# Altium PCB 电机驱动.PcbDoc
Units mil, origin at the board's own origin, x right, y up, seen from the top; angles counter-clockwise.
Board outline 2580 x 1430 mil, 2 copper layers (Top Layer, Bottom Layer); 41 components, 23 nets, 112 pads, 100 vias.
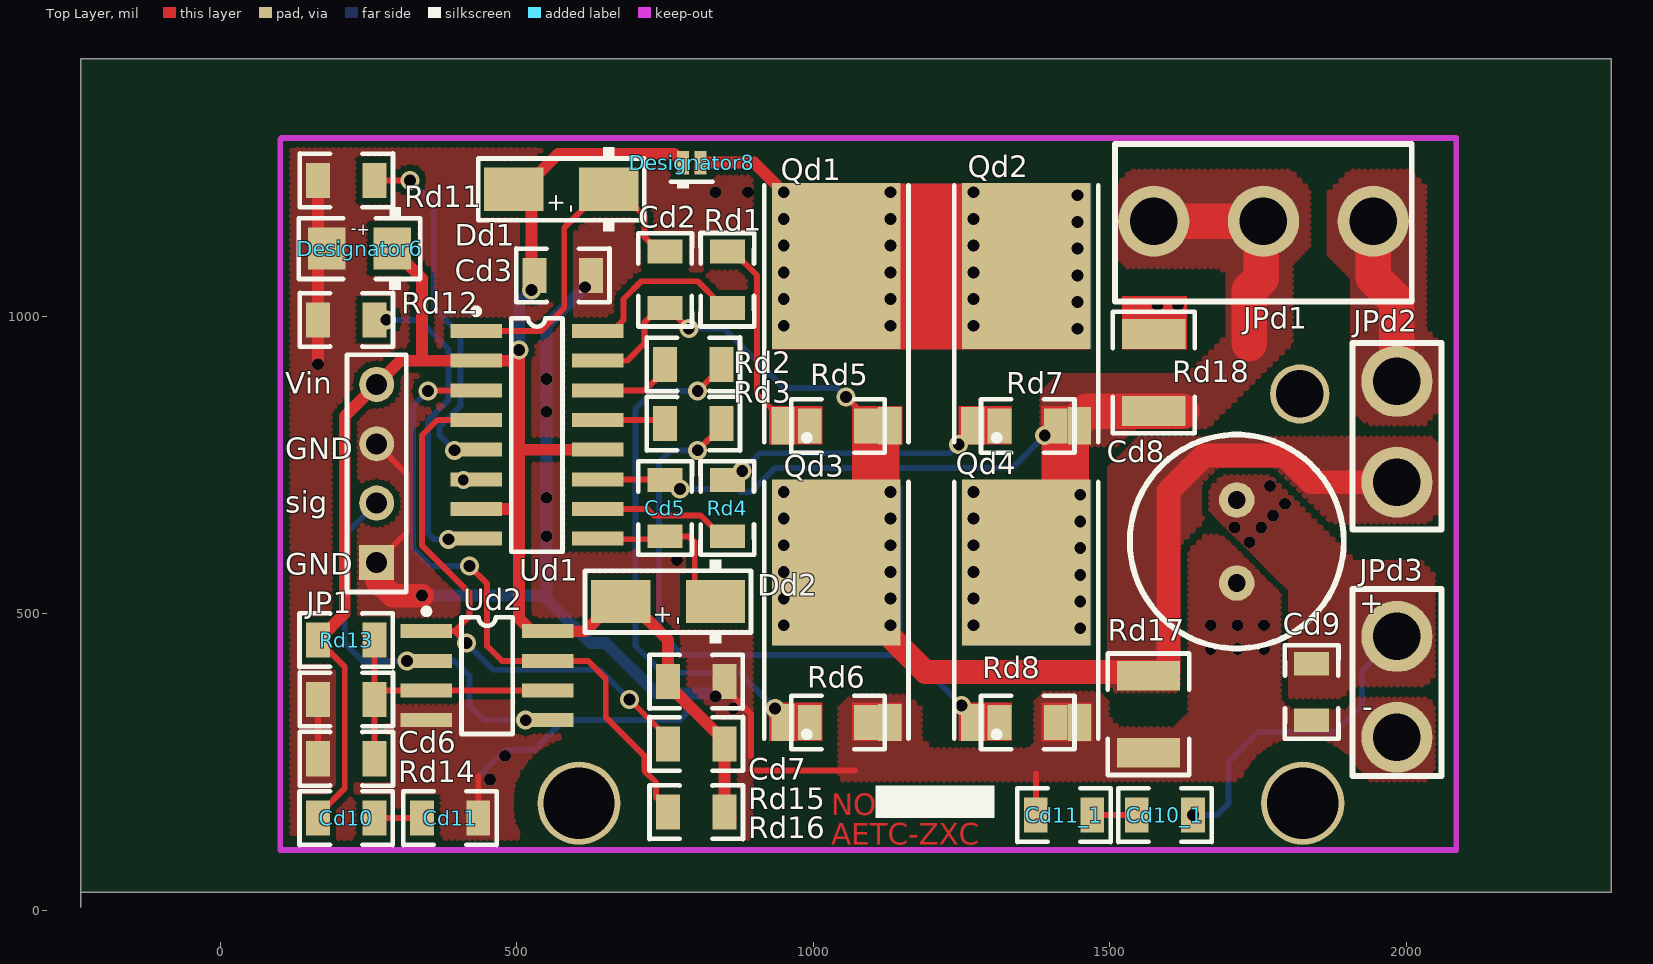
[diagram p0: Top Layer view]
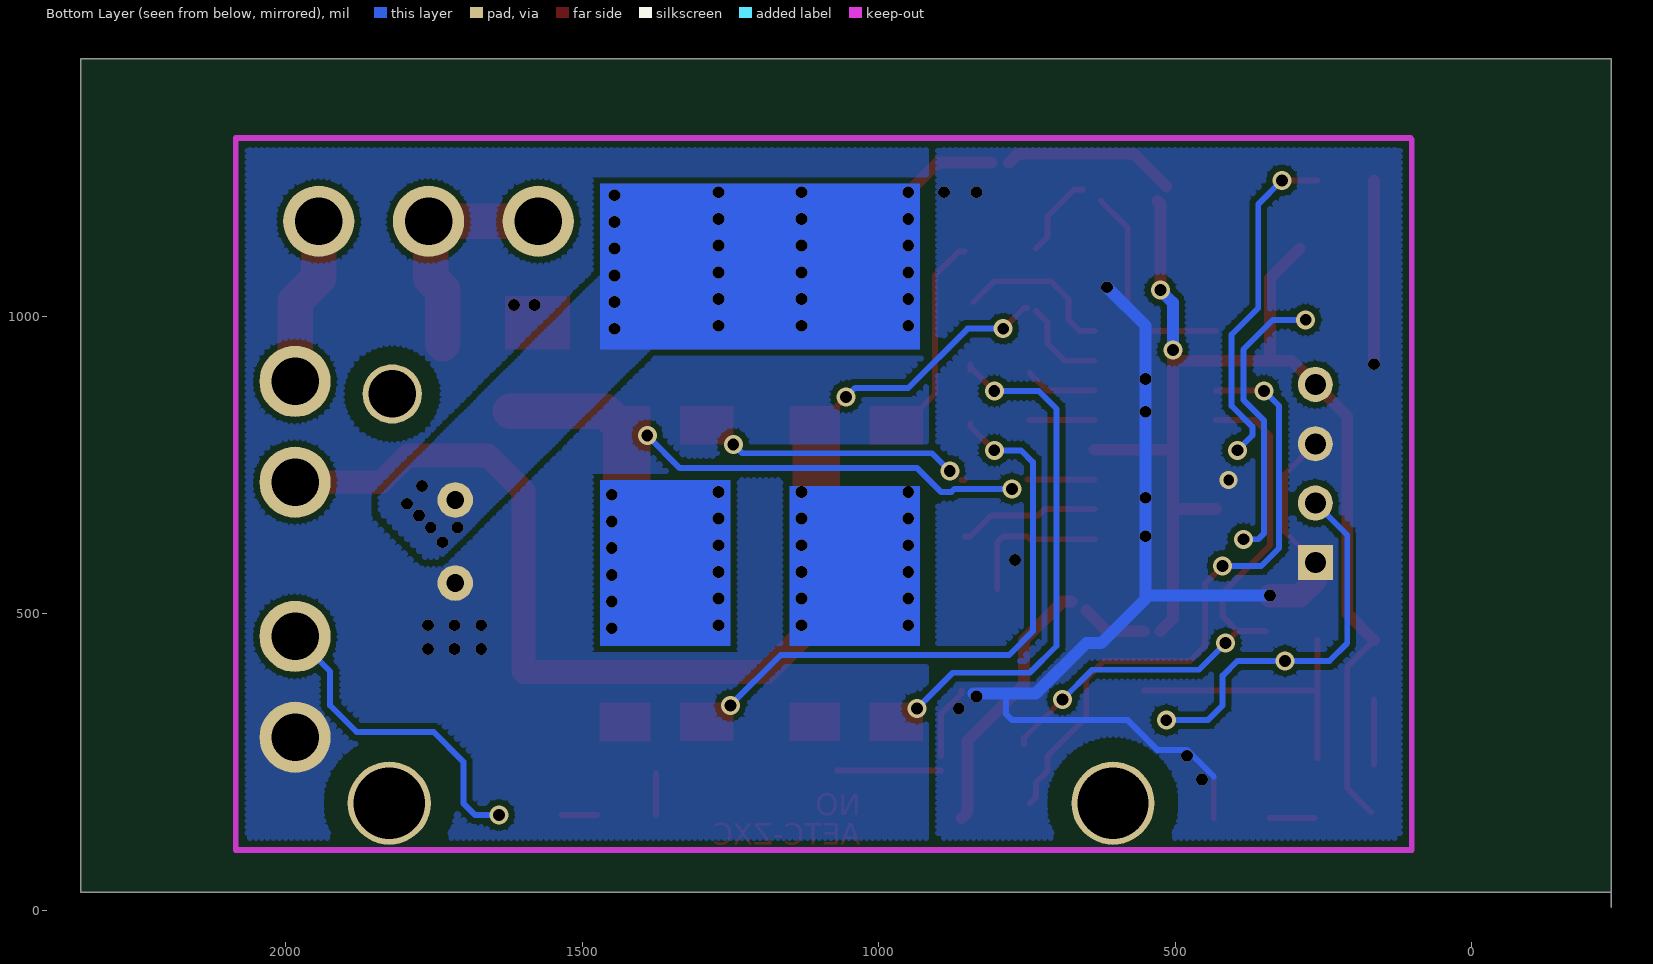
[diagram p1: Bottom Layer view, seen from below]

## Layer stack, top to bottom
Top Layer: signal copper 1.4
Dielectric: dielectric 12.6, FR-4, Dk 4.8
Bottom Layer: signal copper 1.4

## Board outline
-235,5 -235,1435 2345,1435 2345,30 -235,30

## Design rules (kind name [scope] priority, off if disabled: settings)
Clearance [All] p1: gap=10
ComponentClearance [All] p1: gap=1 collisioncheckmode=0
PolygonConnect [All] p1: connectstyle=Direct reliefconductorwidth=10 reliefentries=4 polygonreliefangle="90 Angle"
RoutingVias [All] p1: holewidth=28 width=50 viastyle="Through Hole" minholewidth=28 minwidth=50 maxholewidth=28 maxwidth=50
SolderMaskExpansion [All] p1: expansion=4
TestPointUsage [All] p1: valid=0 allowmultiple=FALSE
Testpoint [All] p1: side=15 testpointundercomponent=TRUE minsize=40 maxsize=100 preferedsize=60 minholesize=0 maxholesize=40 preferedholesize=32 testpointgrid=1 style=1023 order=-539222988
Width [All] p1: maxlimit=80 minlimit=8 preferedwidth=10
17 further rules are at their usual default settings.

## Classes and differential pairs
component class 电机驱动: Cd2 Cd3 Cd5 Cd6 Cd7 Cd8 Cd9 Dd1 Dd2 JP1 JPd1 JPd2 JPd3 Qd1 Qd2 Qd3 Qd4 Rd1 Rd2 Rd3 Rd4 Rd5 Rd6 Rd7 Rd8 Rd11 Rd12 Rd13 Rd14 Rd15 Rd16 Rd17 Rd18 Ud1 Ud2

## Components (designator, comment, footprint, x,y, rotation, side; value= is the part's Value field where it differs from the comment)
Cd2 "Cap" CR2012-0805 750,1065 r270 top
Cd3 "Cap" CR2012-0805 575,1070 r0 top
Cd5 "Cap" CR2012-0805 750,675 r90 top
Cd6 "Cap" CR2012-0805 210,355 r0 top
Cd7 "Cap" CR2012-0805 805,385 r180 top
Cd8 "Cap Pol1" 470U 1713.81,621.19 r0 top
Cd9 "Cap" CR2012-0805 1840,365 r90 top
Cd10 "Cap" CR2012-0805 215,155 r180 top (schematic designator Cd6)
Cd10_1 "Cap" CR2012-0805 1590,160 r0 top (schematic designator Cd6)
Cd11 "Cap" CR2012-0805 390,155 r180 top (schematic designator Cd6)
Cd11_1 "Cap" CR2012-0805 1420,160 r0 top (schematic designator Cd6)
Dd1 "Diode_UFR" DO-214-SMA-YX1 575,1215 r0 top
Dd2 "Diode_UFR" DO-214-SMA-YX1 755,520 r0 top
Designator6 "Comment" C3216-1206-TA-YX1 235,1115 r180 top
Designator8 "Comment" CON2-YX8 795,1260 r0 top
JP1 "Header 4" HDR1X4 263.81,586.03 r90 top (schematic designator JP?)
JPd1 "Header 3" KG_3 1758.81,1161.19 r180 top
JPd2 "Header 2" CON_X2_B 1983.81,806.19 r90 top
JPd3 "Header 2" CON_X2_B 1983.81,376.19 r270 top
Qd1 "NMOS-2" 252 1098.81,1041.03 r0 top
Qd2 "NMOS-2" 252 1418.81,1041.03 r0 top
Qd3 "NMOS-2" 252 1098.81,541.03 r0 top
Qd4 "NMOS-2" 252 1418.81,541.03 r0 top
Rd1 "Res3" CR2012-0805 855,1060 r90 top
Rd2 "Res3" CR2012-0805 795,920 r0 top
Rd3 "Res3" CR2012-0805 795,820 r0 top
Rd4 "Res3" CR2012-0805 855,675 r90 top
Rd5 "Res3" CR2012-0805 1038.81,816.03 r0 top
Rd6 "Res3" CR2012-0805 1038.81,316.03 r0 top
Rd7 "Res3" CR2012-0805 1358.81,816.03 r0 top
Rd8 "Res3" CR2012-0805 1358.81,316.03 r0 top
Rd11 "Res3" CR2012-0805 210,1230 r0 top
Rd12 "Res3" CR2012-0805 210,995 r0 top
Rd13 "Res1" CR2012-0805 215,455 r180 top
Rd14 "Res1" CR2012-0805 210,255 r0 top
Rd15 "Res1" CR2012-0805 800,280 r0 top
Rd16 "Res1" CR2012-0805 800,165 r0 top
Rd17 "Res3" CR3225-1210 1560,330 r270 top
Rd18 "Res3" CR3225-1210 1578.81,906.19 r90 top
Ud1 "HIP4082" sop16 533.81,791.03 r180 top
Ud2 "LM193" SO-8 450,395 r270 top

## Footprints (in the part's own frame and the unit in brackets; to place one, negate y for a bottom-side part, rotate by r counter-clockwise, add the part's x,y. Pads: shape width x height; smd on the part's side, far side on the other; paste and mask are expansions set on the pad)
252 [mm]
  rect 1x1.6 smd: 1(-3.809,-5.711) 3(0.761,-5.711)
  rect 5.5x7.1 smd: 2(-1.524,1.139)
  silkscreen extent -4.61,-6.41 1.56,4.59
470U [mil]
  round 60 hole 30: 1(0,70) 2(0,-70)
  silkscreen extent -180,-180 180,180
C3216-1206-TA-YX1 [mm]
  rect 1.6x1.8 smd: 1(-1.4,0) 2(1.4,0)
  silkscreen extent -2.6,-1.78 2.6,1.78
CON2-YX8 [mil]
  rect 20x40 smd: 1(-15,0) 2(15,0)
  silkscreen extent -35,-44 35,-32
CON_X2_B [mil]
  round 120 hole 80: 1(85,0) 2(-85,0)
  silkscreen extent -165,-75 150,75
CR2012-0805 [mil]
  rect 40x59.05 smd: 1(-45,0) 2(50,0)
  silkscreen extent -76,-45 81,45
CR3225-1210 [mil]
  rect 50x106.3 smd: 1(-65,5) 2(65,5)
  silkscreen extent -102,-64 102,74
DO-214-SMA-YX1 [mil]
  rect 100x73 smd: 1(-80,0) 2(80,0)
  silkscreen extent -140,-71 140,71
HDR1X4 [mm] "Connector; Header; 4 Position"
  rect 1.5x1.5 hole 0.9: 1(0,0)
  round 1.5 hole 0.9: 2(2.54,0) 3(5.08,0) 4(7.62,0)
  silkscreen extent -1.27,-1.27 8.89,1.27
KG_3 [mil]
  round 120 hole 80: 1(-185,0) 2(0,0) 3(185,0)
  silkscreen extent -250,-130 250,135
SO-8 [mm]
  rect 0.6x2.2 smd: 1(-1.906,-2.6) 2(-0.636,-2.6) 3(0.634,-2.6) 4(1.904,-2.6) 5(1.904,2.6) 6(0.634,2.6) 7(-0.636,2.6) 8(-1.906,2.6)
  silkscreen extent -2.88,-2.72 2.5,1.1
sop16 [mm]
  rect 2.2x0.6 smd: 1(2.6,-4.699) 2(2.6,-3.429) 3(2.6,-2.159) 4(2.6,-0.889) 5(2.6,0.381) 6(2.6,1.651) 7(2.6,2.921) 8(2.6,4.191) 9(-2.6,4.191) 10(-2.6,2.921) 11(-2.6,1.651) 12(-2.6,0.381) 13(-2.6,-0.889) 14(-2.6,-2.159) 15(-2.6,-3.429) 16(-2.6,-4.699)
  silkscreen extent -1.1,-5.67 2.72,4.75

## Part data
Cd2 Cd3 Cd5 Cd6 Cd7 Cd9 Cd10 Cd10_1 Cd11 Cd11_1: "Capacitor"
Cd8: "Polarized Capacitor (Radial)"
Dd1 Dd2: "Ultra-Fast Rectifier Diode"
JP1: "Header, 4-Pin"
JPd1: "Header, 3-Pin"
JPd2 JPd3: "Header, 2-Pin"
Qd1 Qd2 Qd3 Qd4: "N-Channel Power MOSFET"
Rd1 Rd2 Rd3 Rd4 Rd5 Rd6 Rd7 Rd8 Rd11 Rd12 Rd13 Rd14 Rd15 Rd16 Rd17 Rd18: "Resistor"
Ud2: library part TLC3702ID, "Dual Micropower LinCMOS Voltage Comparator"

## Free pads (board coordinates)
  round 100 hole 80: 0(1820,870)
  round 140 hole 120: 2(1825,180) 3(605,180)

## Via types
v1: diameter 20, hole 20, Top Layer to Bottom Layer, 76 vias
v2: diameter 32, hole 20, Top Layer to Bottom Layer, 23 vias
v3: diameter 30, hole 18, Top Layer to Bottom Layer, 1 vias

## Nets (pads, with @x,y where several pads share a name; then routed paths per layer and width w, separated by ;. In a path a pad name is that pad's centre, name@x,y a point inside that pad or via, vN(x,y) a via of type N, cw(c..) or ccw(c..) an arc to the next point about the centre after c; other vN are vias at no path point)
AHO: Qd2.1 Rd4.2 Rd7.1 | length 433.8
  Top Layer w10: Rd4.2 Rd4.2@860,725
  Top Layer w40: Qd2.1 1268.85,816.03 Rd7.1
  Bottom Layer w10: v2(880,740) 910,770 1230,770 v2(1245,785)
AHS: Cd5.2 JPd1.2 JPd1.3 Qd2.3 Qd4.2 Rd7.2 Rd18.1 Ud1.11 | length 1522.7
  Top Layer w10: Ud1.11 Cd5.2@748.97,726.03
  Top Layer w40: Qd4.2 Qd4.2@1358.81,699.03 ; Rd7.2 Rd7.2@1420,816.03 ; Rd7.2@1420,825 Qd2.3@1448.77,825 ; JPd1.2@1755,1161.19 JPd1.2
  Top Layer w60: Qd2.3@1435,815 1461.19,841.19 Rd18.1@1621.19,841.19 ; JPd1.3 JPd1.2 ; 1735,955 1735,1045 1755,1065 JPd1.2@1755,1161.19
  Bottom Layer w10: v2(775,710) 872.19,710 877.19,705 895,705 935,745 1335,745 v2(1390,800)
  other v1: 1450,475 1270,480 1450,520 1270,525 1450,565 1270,570 1450,610 1270,615 1450,655 1270,660 1450,700 1270,705
ALO: Qd4.1 Rd3.2 Rd8.1 | length 1026.7
  Top Layer w10: v2(805,775) 845,815 Rd3.2
  Top Layer w40: Qd4.1 1268.85,316.03 Rd8.1
  Bottom Layer w10: v2(805,775) 760,775 740,755 740,470 780,430 1165,430 v2(1250,345)
BHO: Qd1.1 Rd1.2 Rd5.1 | length 330.4
  Top Layer w10: Rd1.2 865,1110 905,1070 905,870 Qd1.1@950,825 ; Qd1.1@948.85,816.03 Qd1.1
BHS: Cd2.2 JPd2.2 Qd1.3 Qd3.2 Rd5.2 Rd17.1 Ud1.15 | length 2266.4
  Top Layer w10: Ud1.15 686.03,926.03 715,955 715,990 Cd2.2@735,1010 ; Cd2.2 755,1015 v2(790,980) ; v2(1055,865) Rd5.2@1080,840
  Top Layer w40: Qd1.3@1128.65,816.03 Rd5.2 1088.81,673.03 1038.81,673.03 1038.81,551.19 1188.81,401.19 1597.62,401.19 1598.81,402.38 1598.81,706.19 1658.81,766.19 1793.81,766.19 1838.81,721.19 JPd2.2 ; Qd1.3@1128.77,816.03 Qd1.3
  Bottom Layer w10: v2(790,980) 850,980 950,880 1040,880 v2(1055,865)
  other v1: 950,480 1130,480 950,525 1130,525 950,570 1130,570 950,615 1130,615 950,660 1130,660 950,705 1130,705
BLO: Qd3.1 Rd2.2 Rd6.1 | length 872.5
  Top Layer w10: v2(805,875) Rd2.2@845,915 ; Rd2.2@845,910 Rd2.2 ; Rd6.1 Rd6.1@993.81,326.03
  Bottom Layer w10: v2(805,875) 730,875 700,845 700,445 745,400 875,400 v2(935,340)
CMP: Cd6.2 Rd13.1 Rd14.2 Ud2.3 Ud2.6 | length 492.3
  Top Layer w10: Rd14.2 Rd13.1 ; Cd6.2@260.05,370.05 Ud2.6
DGND: Ud1.6
MOTOR-: JPd1.1 JPd2.1 | length 286.6
  Top Layer w60: JPd1.1 1943.81,1066.19 1983.81,1026.19 JPd2.1
MOTOR_CTL: JP1.2 Ud2.2 Ud2.5 | length 646.5
  Bottom Layer w10: JP1.2 210,632.22 210,450 240,420 395,420 420,395 420,345 445,320 v2(515,320)
  other v2: 315,420
MOTOR_CTL+: Rd15.1 Ud1.4 Ud2.1 | length 960.6
  Top Layer w10: Ud2.1 395.05,470.05 ; v2(415,450) 395.05,469.95 395.05,470.05 ; Ud1.4 366.03,826.03 340,800 340,615 420,535 420,495 395.05,470.05 ; v2(690,355) 755,290 Rd15.1
  Bottom Layer w10: v2@420,445 460,405 640,405 v2(690,355)
MOTOR_CTL-: Rd16.1 Ud1.3 Ud2.7 | length 1082.8
  Top Layer w10: v2@351.03,876.03 Ud1.3 ; v2(420,580) 450,550 450,445 474.95,420.05 619.95,420.05 650,390 650,325 715,260 715,235 735,215 735,190 Rd16.1@745,180
  Bottom Layer w10: v2(350,875) 325,850 325,610 355,580 v2(420,580)
NetCd2_1: Cd2.1 Dd1.2 Ud1.1 | length 505.3
  Top Layer w10: Ud1.1 541.03,976.03 580,1015 580,1150 Dd1.2@625,1195 ; Dd1.2 670,1215 715,1170 715,1135 Cd2.1@735,1115
NetCd5_1: Cd5.1 Dd2.2 Ud1.9 | length 244.1
  Top Layer w10: Ud1.9@635,625 Cd5.1@745,625 ; Cd5.1 790,630 800,620 Dd2.2@800,540
NetRd1_1: Rd1.1 Ud1.16 | length 273.6
  Top Layer w10: Ud1.16 661.03,976.03 680,995 680,1030 710,1060 805,1060 Rd1.1@840,1025
NetRd2_1: Rd2.1 Ud1.14 | length 120.8
  Top Layer w10: Ud1.14 716.03,876.03 Rd2.1@745,905
NetRd3_1: Rd3.1 Ud1.13 | length 109.9
  Top Layer w10: Ud1.13 Rd3.1@746.03,826.03
NetRd4_1: Rd4.1 Ud1.10 | length 237.9
  Top Layer w10: Ud1.10 720,676.03 731.03,665 810,665 845,630 Rd4.1
NetRd11_2: Rd11.2 Ud1.5 | length 575.1
  Top Layer w10: Rd11.2 v2(320,1230)
  Bottom Layer w10: v2(320,1230) 360,1190 360,1015 405,970 405,850 370,815 370,800 v2(395,775)
NetRd12_2: Rd12.2 Ud1.8 | length 489.4
  Bottom Layer w10: v2(280,995) 335,995 385,945 385,860 350,825 350,635 360,625 v2(385,625)
PGND: Cd3.2 Cd6.1 Cd7.1 Cd8.2 Cd9.1 Cd11.1 Cd11_1.1 Designator6.2 JP1.1 JP1.3 JPd3.1 Qd3.3 Qd4.3 Rd6.2 Rd8.2 Rd11.1 Rd12.1 Rd14.1 Rd17.2 Rd18.2 Ud2.4 | length 2812.8
  Top Layer w10: Rd14.1@165,245 Cd6.1 ; JP1.1 315,637.22 315,734.84 JP1.3 ; Cd11.1 435,225 ; Cd7.1@860,370 860,365 895,330 895,260 ; 895,235 1070,235 ; Cd11_1.1 1375,230
  Top Layer w20: v1(165,920) Rd11.1 ; 320,530 v1(340,530)
  Top Layer w40: 263.81,556.19 290,530 v1(340,530) ; Rd6.2 Qd3.3@1113.81,316.03 ; Qd3.3@1128.77,316.03 Qd3.3 ; Rd8.2@1408.81,317.03 Rd8.2 Qd4.3@1438.81,316.03 ; Qd4.3@1448.77,316.03 Qd4.3 Qd4.3@1448.77,317.03
  Bottom Layer w10: 435,225 480,270 530,270 580,320 775,320 785,330 785,365
  Bottom Layer w20: v1(340,530) 550,530 ; v1(615,1050) 550,985 550,525 625,450 650,450 735,365 v1@840,365
  other v1: 455,220 480,260 865,340 835,360 1670,440 1715,440 1760,440 1670,480 1715,480 1760,480 770,590 550,630 550,695 550,840 550,895 1580,1020 1615,1020 835,1210 890,1210
  other v3: 410,725
V+12: Cd3.1 Cd7.2 Cd10.2 Dd1.1 Dd2.1 Designator6.1 Designator8.1 JP1.4 Rd13.2 Rd15.2 Rd16.2 Ud1.2 Ud1.7 Ud1.12 Ud2.8 | length 3064.3
  Top Layer w10: Rd13.2 210,410 210,205 Cd10.2@170,165
  Top Layer w20: Rd13.2 210,500 210,832.22 303.81,926.03 503.97,926.03 ; Designator6.1 340,1065.12 340,926.03 ; Ud1.7 502.93,676.03 ; v2(503.97,943.97) 503.97,491.03 Ud2.8@525,470 ; 507.93,776.03 Ud1.12 ; Dd1.1@515,1220 570,1275 765,1275 Designator8.1 ; v2(525,1045) 525,1190 Dd1.1@530,1195 ; Ud2.8 615.05,470.05 Dd2.1@650,505 ; Dd2.1 690,520 755,455 755,380 850,285 Rd16.2 Rd16.2@860,155
  Bottom Layer w20: v2(503.97,943.97) 503.97,1023.97 v2(525,1045)
VBAT: Cd8.1 Cd9.2 Cd10_1.2 Designator8.2 JPd3.2 Qd1.2 Qd2.2 | length 1282.8
  Top Layer w20: Designator8.2 900,1260 Qd1.2@945,1215
  Top Layer w40: Qd1.2 1423.97,1085.88 1423.97,1038.03 1358.81,1038.03 Qd2.2 ; JPd3.2@1943.81,461.19 JPd3.2
  Bottom Layer w10: v2(1640,160) 1680,160 1700,180 1700,250 1750,300 1880,300 1925,345 1925,402.38 JPd3.2
  other v1: 1735,620 1710,645 1755,645 1775,665 1795,685 1770,715 1445,980 950,985 1130,985 1270,985 1445,1025 950,1030 1130,1030 1270,1030 1445,1070 950,1075 1130,1075 1270,1075 1445,1115 950,1120 1130,1120 1270,1120 1445,1160 950,1165 1130,1165 1270,1165 1445,1205 950,1210 1130,1210 1270,1210
pads on no net: Cd10.1 Cd10_1.1 Cd11.2 Cd11_1.2
copper on no net: | length 135
  Top Layer w10: 265,155 340,155 ; 1475,160 1535,160

## Polygon pours and split planes (outlines as drawn)
PGND on Top Layer (hatched 90Degree grid 10 track 10, remove dead copper): 895,1300 105,1300 105,105 895,105
PGND on Top Layer (hatched 90Degree grid 10 track 10, remove dead copper): 1045,340 1045,220 2030,220 2045,235 2045,345 2035,355 1920,355 1900,335 1805,335 1790,350 1790,531.72 1691.72,630 1660,630 1635,605 1635,330 1610,305 1515,305 1495,325 1495,350 1480,365 1390,365 1375,350 1375,280 1365,270 1200,270 1180,290 1180,340 1160,360 1065,360
VBAT on Top Layer (hatched 90Degree grid 10 track 10, remove dead copper): 1805,360 1805,540 1720,625 1670,675 1670,710 1690,730 1770,730 1915,585 2025,585 2045,565 2045,395 2030,380 1910,380 1890,360
BHS on Top Layer (hatched 90Degree grid 10 track 10, remove dead copper): 1510,370 1610,370 1620,380 1620,620 1645,645 1655,655 1655,710 1680,735 1775,735 1845,665 1855,655 2035,655 2055,675 2055,780 2040,795 1550,795 1500,745 1500,380
AHS on Top Layer (hatched 90Degree grid 10 track 10, remove dead copper): 1385,785 1510,785 1535,810 1660,810 1805,955 1805,1090 1835,1120 1835,1215 1805,1245 1535,1245 1510,1220 1510,1105 1530,1085 1685,1085 1700,1070 1700,970 1630,900 1415,900 1390,875 1385,870
MOTOR- on Top Layer (hatched 90Degree grid 10 track 10, remove dead copper): 1935,820 1910,845 1910,1065 1870,1105 1870,1210 1905,1245 2005,1245 2030,1220 2030,980 2055,955 2055,845 2030,820
PGND on Bottom Layer (hatched 90Degree grid 10 track 10, remove dead copper): 105,105 105,1295 900,1295 900,100 110,100
PGND on Bottom Layer (hatched 90Degree grid 10 track 10, remove dead copper): 920,1300 920,100 2085,100 2085,1300
VBAT on Bottom Layer (hatched 90Degree grid 10 track 10, remove dead copper): 1735,600 1390,945 1365,970 1465,1070 1825,710 1840,695 1840,670 1765,595 1740,595

## Keep-outs
Keep-Out Layer:
  lines w10: 101.19,1298.81 101.19,101.19 2083.81,101.19 2083.81,201.19 2083.81,1301.19 203.97,1301.19 103.57,1301.19

## Other copper
Top Layer:
  rectangle net AHS: 1385,715 1465,850
  rectangle net BHO: 925,785 1015,850
  rectangle net BLO: 925,285 1015,350
  rectangle net AHO: 1245,785 1335,850
  rectangle net ALO: 1245,285 1335,350
  rectangle net BHS: 1065,785 1150,850
  rectangle net PGND: 1065,285 1150,350
  rectangle net PGND: 1385,284.44 1470.4,350
  rectangle net VBAT: 930,945 1465,1225
  rectangle net BHS: 1065,700 1145,850
  rectangle net PGND: 1520,945 1630,1035
  text "NO" at 1030,160 h36
  text "AETC-ZXC" at 1030,110 h36
Bottom Layer:
  rectangle net VBAT: 930,945 1470,1225
  rectangle net BHS: 930,445 1150,715
  rectangle net AHS: 1250,445 1470,725

## Silkscreen, mask and mechanical layers (free items; w line width, h text height)
Top Overlay:
  rectangle: 1105,155 1305,210
  text "Vin" at 110,870 h36
  text "GND" at 110,760 h36
  text "sig" at 110,670 h36
  text "GND" at 110,565 h36
  text "+" at 1920,500 h36
  text "-" at 1925,325 h36

## Text inside footprints (layer, text, board x,y; h text height)
Dd1: Top Overlay "-" at 603,1175 h30 r90; Top Overlay "+" at 579,1175 h30 r90
Dd2: Top Overlay "-" at 783,480 h30 r90; Top Overlay "+" at 759,480 h30 r90
Designator6: Top Overlay "-" at 230,1155 h20 r180; Top Overlay "+" at 253,1155 h20 r180